# Altium PCB PCB1.PcbDoc
Units mm, origin at the board's own origin, x right, y up, seen from the top; angles counter-clockwise.
Board outline 83 x 36 mm, 2 copper layers (Top Layer, Bottom Layer); 22 components, 13 nets, 75 pads, 57 vias.
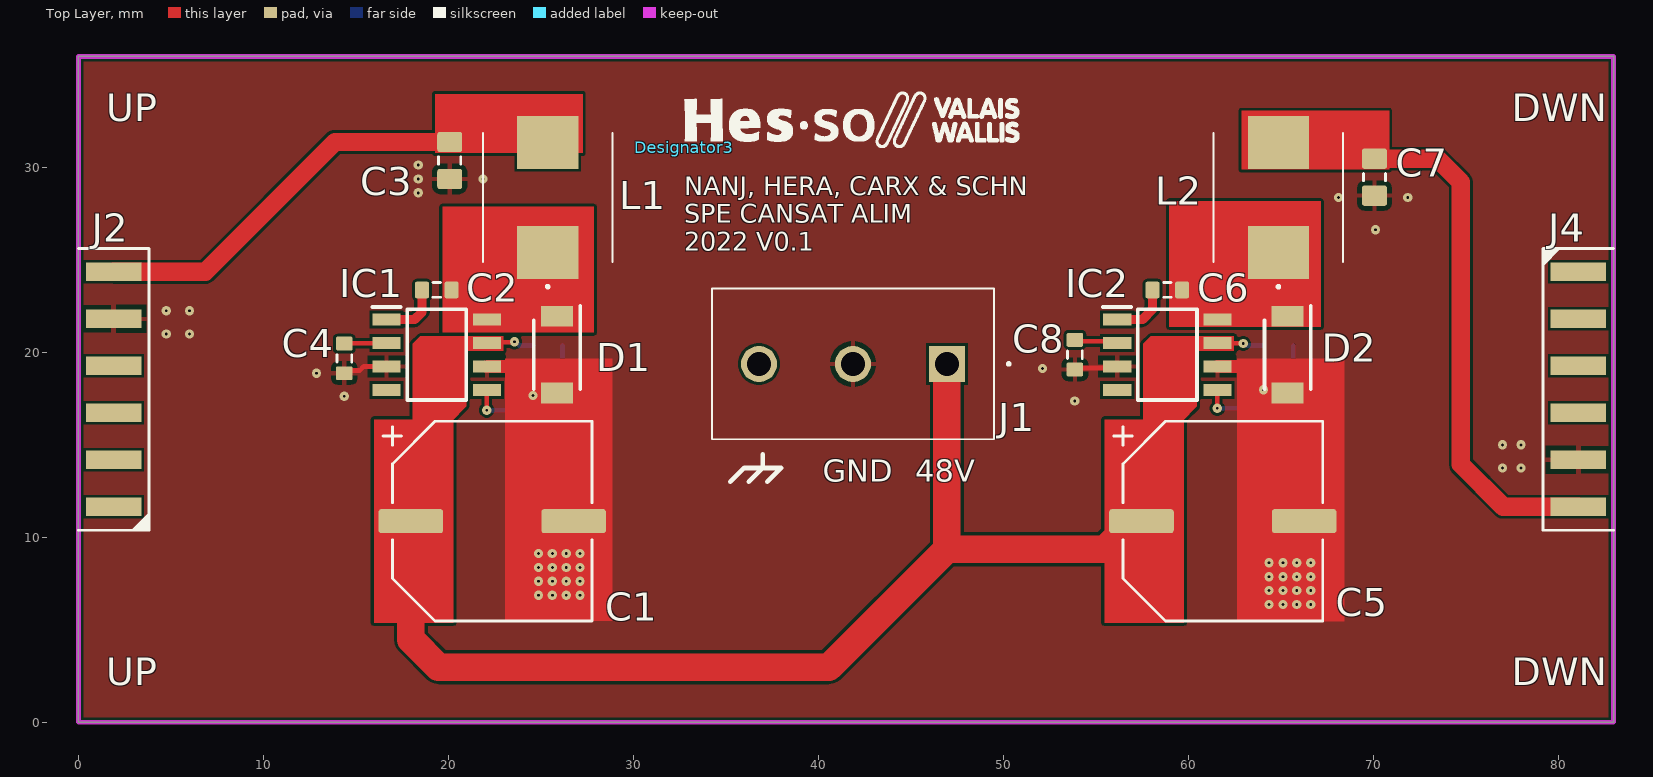
[diagram p0: Top Layer view]
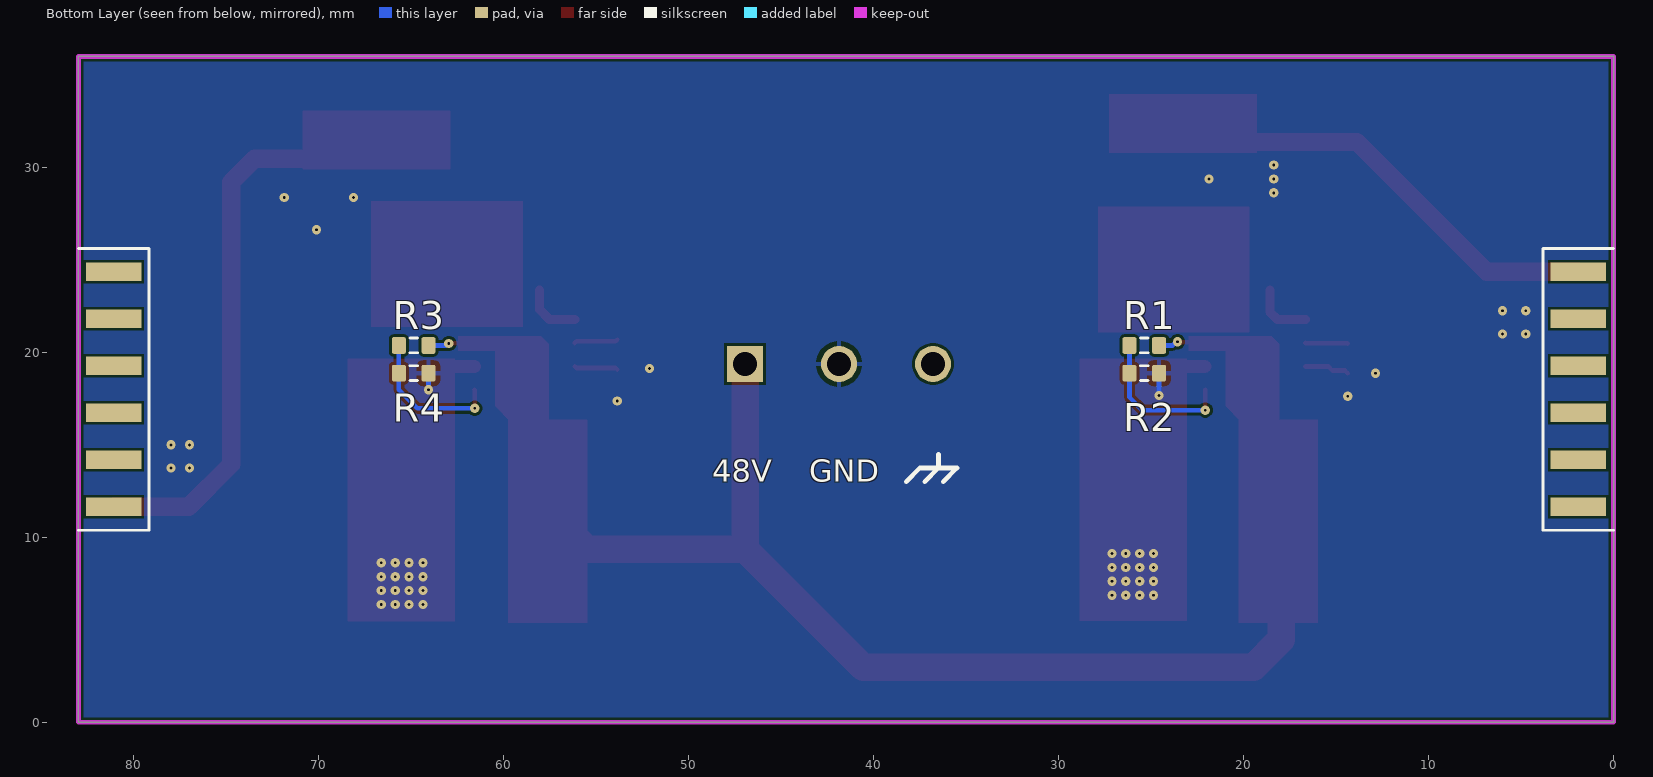
[diagram p1: Bottom Layer view, seen from below]
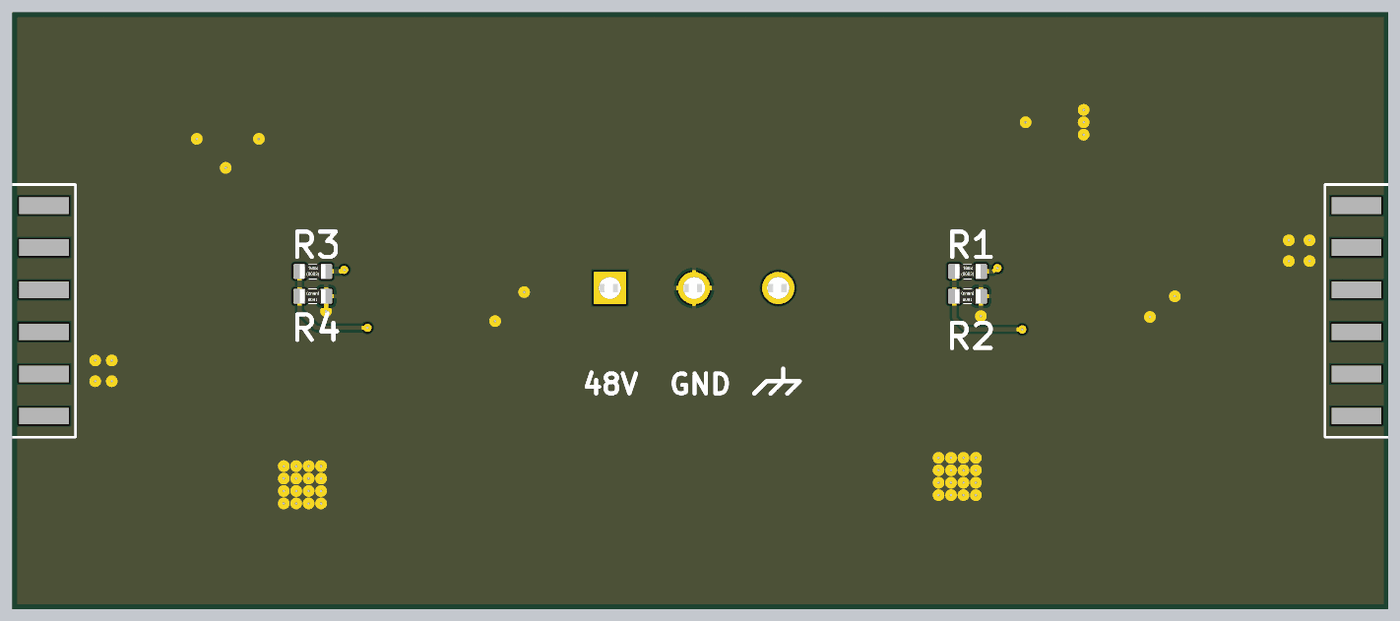
[diagram p2: 3D render of the assembled board from below, using the file's embedded part models]

## Layer stack, top to bottom
Top Solder: solder mask 0.0102, Solder Resist, Dk 3.5
Top Layer: signal copper 0.0356
Dielectric 1: dielectric 0.32, FR-4, Dk 4.8
Bottom Layer: signal copper 0.0356
Bottom Solder: solder mask 0.0102, Solder Resist, Dk 3.5

## Board outline
0.002,0.002 0.002,36.002 83.002,36.002 83.002,0.002

## Design rules (kind name [scope] priority, off if disabled: settings)
AssemblyTestPointUsage [All] p1 off:
AssemblyTestpoint [All] p1 off: testpointundercomponent=TRUE minsize=1.016 maxsize=2.54 preferedsize=1.524 minholesize=0 maxholesize=1.016 preferedholesize=0.813 testpointgrid=0.025 usegrid=TRUE gridtolerance=0 allowsidetop=TRUE allowsidebottom=TRUE
Clearance [All] p1: gap=0.15 ignorepadtopadclearanceinfootprint=TRUE
ComponentClearance [All] p1 off: gap=0.254 collisioncheckmode=3 verticalgap=0.254 showdistances=FALSE
DiffPairsRouting [All] p1 off: maxlimit=0.254 minlimit=0.254 mostfreqgap=0.254 toplayer_minwidth=0.381 toplayer_maxwidth=0.381 toplayer_prefwidth=0.381 bottomlayer_minwidth=0.381 bottomlayer_maxwidth=0.381 bottomlayer_prefwidth=0.381 maxuncoupledlength=12.7
FabricationTestPointUsage [All] p1 off: valid=0 allowmultiple=FALSE
FabricationTestpoint [All] p1 off: side=3 testpointundercomponent=TRUE minsize=1.016 maxsize=2.54 preferedsize=1.524 minholesize=0 maxholesize=1.016 preferedholesize=0.813 testpointgrid=0.025 allowsidetop=TRUE allowsidebottom=TRUE usegrid=TRUE gridtolerance=0
FanoutControl Fanout_BGA [IsBGA] p1 off: bgadir=Out bgaviamode=Centered fanoutstyle=Auto fanoutdirection=Alternating viagrid=0.025 // Fanout_BGA (Default Rule)
FanoutControl Fanout_LCC [IsLCC] p2 off: bgadir=Out bgaviamode=Centered fanoutstyle=Auto fanoutdirection=Alternating viagrid=0.025 // Fanout_LCC (Default Rule)
FanoutControl Fanout_SOIC [IsSOIC] p3 off: bgadir=Out bgaviamode=Centered fanoutstyle=Auto fanoutdirection=Alternating viagrid=0.025 // Fanout_SOIC (Default Rule)
FanoutControl Fanout_Small [(CompPinCount < 5)] p4 off: bgadir=Out bgaviamode=Centered fanoutstyle=Auto fanoutdirection=OutThenIn viagrid=0.025 // Fanout_Small (Default Rule)
FanoutControl Fanout_Default [All] p5 off: bgadir=Out bgaviamode=Centered fanoutstyle=Auto fanoutdirection=Alternating viagrid=0.025 // Fanout_Default (Default Rule)
Height [All] p1 off: minheight=0 maxheight=25.4 prefheight=12.7
HoleSize [All] p1 off: absolutevalues=TRUE maxlimit=2.54 minlimit=0.025 maxpercent=80.000 minpercent=20.000
HoleToHoleClearance [All] p1 off: gap=0.254 allowstackedmicrovias=TRUE
LayerPairs [All] p1 off: enforce=TRUE
MinimumSolderMaskSliver [All] p1 off: minsoldermaskwidth=0.254
NetAntennae [All] p1 off: netantennaetolerance=0
PasteMaskExpansion [All] p1 off: expansion=0
PlaneClearance [All] p1: clearance=0.25
PolygonConnect [All] p1: thpad.connectstyle=Relief thpad.reliefconductorwidth=0.254 thpad.reliefentries=4 thpad.polygonreliefangle="90 Angle" thpad.airgapwidth=0.254 smdpad.connectstyle=Relief smdpad.reliefconductorwidth=0.254 smdpad.reliefentries=4 smdpad.polygonreliefangle="90 Angle" smdpad.airgapwidth=0.254 via.connectstyle=Direct via.reliefconductorwidth=0.254 via.reliefentries=4 via.polygonreliefangle="90 Angle" via.airgapwidth=0.254
RoutingCorners [All] p1 off: cornerstyle=45-Degree minsetback=2.54 maxsetback=2.54
RoutingLayers [All] p1 off: top layer_v5=TRUE bottom layer_v5=TRUE
RoutingPriority [All] p1 off: routingpriority=0
RoutingTopology [All] p1 off: topology=Shortest
RoutingVias [All] p1: holewidth=0.15 width=0.5 viastyle="Through Hole" minholewidth=0.15 minwidth=0.5 maxholewidth=0.15 maxwidth=0.5 viatemplateguid#1={0F8D6943-ADF0-4AAE-A0C8-86B730172CDF} viatemplatename#1=v50h15m0mx0
SilkToSilkClearance [All] p1 off: silktosilkclearance=0.254
SilkToSolderMaskClearance [IsPad] p1 off: minsilkscreentomaskgap=0.254 clearancetoexposedcopper=TRUE
SolderMaskExpansion [All] p1 off: expansion=0.102 istentingtop=FALSE
Width [All] p1: maxlimit=2 minlimit=0.15 preferedwidth=0.25
5 further rules are at their usual default settings.

## Classes and differential pairs
component class PowerSupply: C1 C2 C3 C4 C5 C6 C7 C8 D1 D2 IC1 IC2 L1 L2 R1 R2 R3 R4

## Components (designator, comment, footprint, x,y, rotation, side; value= is the part's Value field where it differs from the comment)
C1 "68uF/63V" "Capacitor POL SMD D10.0 H10.0" 22.375,10.875 r0 top
C2 "100nF" "CAPACITOR 1608 REFLOW" 19.375,23.375 r0 top
C3 "68uF/6.3V" "CAPACITOR 2012 REFLOW" 20.075,30.375 r90 top
C4 "100nF" "CAPACITOR 1608 REFLOW" 14.375,19.675 r270 top
C5 "68uF/63V" "Capacitor POL SMD D10.0 H10.0" 61.875,10.875 r0 top
C6 "100nF" "CAPACITOR 1608 REFLOW" 58.875,23.375 r0 top
C7 "68uF/6.3V" "CAPACITOR 2012 REFLOW" 70.075,29.475 r90 top
C8 "100nF" "CAPACITOR 1608 REFLOW" 53.875,19.875 r270 top
D1 "RB088LAM100TFTR" SODFL4725X105N 25.875,19.875 r270 top
D2 "RB088LAM100TFTR" SODFL4725X105N 65.375,19.875 r270 top
Designator3 "Comment" "HES-SO_3 Top Overlay" 32.75,31.088 r0 top
IC1 "MAX5035BASA+" SOIC127P600X175-8N 19.375,19.875 r0 top
IC2 "MAX5035AASA+" SOIC127P600X175-8N 58.875,19.875 r0 top
J1 "1729131" 1729131 46.955,19.375 r180 top
J2 "*" "PINHEADER2X6 P2.54 SIDE MOUNT" 0,18 r180 top
J4 "*" "PINHEADER2X6 P2.54 SIDE MOUNT" 83,18 r0 top
L1 "SPM7054VT-101M-D" SPM7054VT 25.375,28.375 r90 top
L2 "SPM7054VT-101M-D" SPM7054VT 64.875,28.375 r90 top
R1 "1M" "RESISTOR 1608 REFLOW" 25.375,20.375 r180 bottom
R2 "384k" "RESISTOR 1608 REFLOW" 25.375,18.875 r0 bottom
R3 "1M" "RESISTOR 1608 REFLOW" 64.875,20.375 r180 bottom
R4 "384k" "RESISTOR 1608 REFLOW" 64.875,18.875 r0 bottom

## Footprints (in the part's own frame and the unit in brackets; to place one, negate y for a bottom-side part, rotate by r counter-clockwise, add the part's x,y. Pads: shape width x height; smd on the part's side, far side on the other; paste and mask are expansions set on the pad)
1729131 [mm]
  rect 1.95x1.95 hole 1.3: 1(0,0)
  round 1.95 hole 1.3: 2(5.08,0) 3(10.16,0)
  silkscreen extent -3.4,-4.08 12.7,4.08, body extent -2.95,-4.05 12.64,4.05, height 10.17
"CAPACITOR 1608 REFLOW" [mm] "Capacitor SMD 1.6x0.8mm (0603-imperial)"
  rrect25% 0.75x0.9 smd: 1(-0.8,0) 2(0.8,0)
  silkscreen extent -0.2,-0.4 0.2,0.4, body extent -0.8,-0.4 0.8,0.4, height 0.8
"CAPACITOR 2012 REFLOW" [mm] "Capacitor SMD 2.0x1.2mm (0805-imperial)"
  rrect25% 1.1x1.35 smd: 1(-1,0) 2(1,0)
  silkscreen extent -0.2,-0.6 0.2,0.6, body extent -1,-0.6 1,0.6, height 1
"Capacitor POL SMD D10.0 H10.0" [mm] "Capacitor Electrolyte Polarized SMD, Diameter 10mm, Height 10mm"
  rrect25% 3.5x1.3 smd: 1(-4.4,0) 2(4.4,0)
  silkscreen extent -5.9,-5.4 5.4,5.4, body extent -5.2,-5.2 5.2,5.2, height 10.01
"HES-SO_3 Top Overlay" [mm] "HESSO LOGO 3mm on TopOverlay"
  silkscreen extent 0.01,0 18.12,3
"PINHEADER2X6 P2.54 SIDE MOUNT" [mm] "Plug connector Mounted on PCB side"
  rect 3x1 smd: 1(-1.905,6.35) 3(-1.905,3.81) 5(-1.905,1.27) 7(-1.905,-1.27) 9(-1.905,-3.81) 11(-1.905,-6.35)
  rect 3x1 smd far side: 2(-1.905,6.35) 4(-1.905,3.81) 6(-1.905,1.27) 8(-1.905,-1.27) 10(-1.905,-3.81) 12(-1.905,-6.35)
  silkscreen extent -3.81,-7.62 0,7.62, body extent -2.86,-7.62 8.57,7.62, height 1.75
"RESISTOR 1608 REFLOW" [mm] "Resistor SMD 1.6x0.8mm (0603-imperial)"
  rrect25% 0.75x0.9 smd: 1(-0.8,0) 2(0.8,0)
  silkscreen extent -0.2,-0.4 0.2,0.4, body extent -0.77,-0.42 0.78,0.43, height 0.45
SODFL4725X105N [mm]
  rect 1.12x1.72 smd: 1(-2.075,0) 2(2.075,0)
  silkscreen extent -2.64,-1.25 1.85,1.25, body extent -2.35,-1.25 2.35,1.25, height 1.05
SOIC127P600X175-8N [mm]
  rect 1.525x0.65 smd: 1(-2.712,1.905) 2(-2.712,0.635) 3(-2.712,-0.635) 4(-2.712,-1.905) 5(2.712,-1.905) 6(2.712,-0.635) 7(2.712,0.635) 8(2.712,1.905)
  silkscreen extent -3.47,-2.45 1.6,2.58, body extent -3,-2.45 3,2.45, height 1.75
SPM7054VT [mm]
  rect 2.85x3.3 smd: 1(-2.975,0) 2(2.975,0)
  silkscreen extent -4.87,-3.5 3.5,3.5, body extent -3.68,-3.5 3.82,3.5, height 5.25

## Part data
C1 C5: library part "Capacitor Polarized", "Capacitor polarized"
C2 C3 C4 C6 C7 C8: library part Capacitor, "Capacitor"
D1 D2: "Schottky Diode", Manufacturer_Name="ROHM Semiconductor", Mouser Part Number=755-RB088LAM100TFTR, Datasheet Link=https://datasheet.datasheetarchive.com/originals/distributors/DKDS-39/8680.pdf, Height=1.05mm, Manufacturer_Part_Number=RB088LAM100TFTR, Mouser Price/Stock=https://www.mouser.co.uk/ProductDetail/ROHM-Semiconductor/RB088LAM100TFTR?qs=F5EMLAvA7IBXK%2Ft6O%252B6mTA%3D%3D
IC1: "Integrated Circuit", Manufacturer_Name="Maxim Integrated", Mouser Part Number=700-MAX5035BASA, Datasheet Link=http://datasheets.maximintegrated.com/en/ds/MAX5035.pdf, Height=1.75mm, Manufacturer_Part_Number=MAX5035BASA+, Mouser Price/Stock=https://www.mouser.co.uk/ProductDetail/Maxim-Integrated/MAX5035BASA%2b?qs=1THa7WoU59FgpJhZAGMb5g%3D%3D
IC2: library part MAX5035BASA+, "Integrated Circuit", Manufacturer_Name="Maxim Integrated", Mouser Part Number=700-MAX5035BASA, Datasheet Link=http://datasheets.maximintegrated.com/en/ds/MAX5035.pdf, Height=1.75mm, Manufacturer_Part_Number=MAX5035BASA+, Mouser Price/Stock=https://www.mouser.co.uk/ProductDetail/Maxim-Integrated/MAX5035BASA%2b?qs=1THa7WoU59FgpJhZAGMb5g%3D%3D
J1: "Connector", Manufacturer_Name="Phoenix Contact", Mouser Part Number=651-1729131, Arrow Part Number=1729131, Arrow Price/Stock=https://www.arrow.com/en/products/1729131/phoenix-contact, Datasheet Link=http://www.phoenixcontact.com/de/produkte/1729131/pdf, Height=10.15mm, Manufacturer_Part_Number=1729131, Mouser Price/Stock=https://www.mouser.co.uk/ProductDetail/Phoenix-Contact/1729131?qs=GFUSqQMLmmkspw%2F%2FW6PC3g%3D%3D
J2 J4: library part PinHeader2x6, "Plug connector"
L1 L2: "Inductor (FeSi Core)", Manufacturer_Name=TDK, Mouser Part Number=810-SPM7054VT-101M-D, Arrow Part Number=SPM7054VT-101M-D, Arrow Price/Stock=https://www.arrow.com/en/products/spm7054vt-101m-d/tdk, Datasheet Link=https://product.tdk.com/system/files/dam/doc/product/inductor/inductor/smd/catalog/inductor_automotive_power_spm7054vt-d_en.pdf, Manufacturer_Part_Number=SPM7054VT-101M-D, Mouser Price/Stock=https://www.mouser.co.uk/ProductDetail/TDK/SPM7054VT-101M-D/?qs=byeeYqUIh0MPh4h9VcxBVA%3D%3D
R1 R2 R3 R4: library part Resistor, "Resistor"

## Via types
v1: diameter 0.5, hole 0.15, Top Layer to Bottom Layer, 57 vias

## Nets (pads, with @x,y where several pads share a name; then routed paths per layer and width w, separated by ;. In a path a pad name is that pad's centre, name@x,y a point inside that pad or via, vN(x,y) a via of type N, cw(c..) or ccw(c..) an arc to the next point about the centre after c; other vN are vias at no path point)
+3V3: C7.2 J4.11 L2.2 | length 27.8
  Top Layer w1: C7.2 73.475,30.475 74.75,29.2 74.75,13.939 77.039,11.65 J4.11
+5: C3.2 J2.11 L1.2 | length 21.1
  Top Layer w1: J2.11 6.85,24.35 13.875,31.375 C3.2
+48V: C1.1 C5.1 IC1.7 IC2.7 J1.1 R1.2 R3.2 | length 65.2
  Top Layer w0.25: IC1.7 22.12,20.542 23.542,20.542 v1(23.575,20.575) ; IC2.7 61.605,20.492 62.958,20.492 v1(62.975,20.475)
  Top Layer w1.5: C1.1 17.975,4.475 19.475,2.975 40.575,2.975 46.955,9.355 ; J1.1 46.955,9.355 ; C5.1 57.375,10.775 56.475,10.775 56.475,10.334 55.496,9.355 46.955,9.355
  Bottom Layer w0.25: v1(23.575,20.575) 23.637,20.575 23.837,20.375 R1.2 ; v1(62.975,20.475) 63.043,20.475 63.143,20.375 R3.2
EARTH: J1.3
GND: C1.2 C3.1 C4.2 C5.2 C7.1 C8.2 D1.2 D2.2 IC1.3 IC1.6 IC2.3 IC2.6 J1.2 J2.9 J4.9 R2.1 R4.1 | length 11.1
  Top Layer w0.25: C4.2 14.52,19.02 15.2,19.02 15.42,19.24 IC1.3 ; 24.21,19.24 24.275,19.175 ; C8.2 53.957,19.157 56.08,19.157 IC2.3 ; 63.54,19.24 63.575,19.275
  Top Layer w0.7: IC1.6 24.21,19.24 ; IC2.6 63.54,19.24
  Bottom Layer w0.25: v1(24.575,17.675) R2.1 ; v1(64.075,17.975) R4.1
  other v1: 64.375,6.375 65.125,6.375 65.875,6.375 66.625,6.375 24.875,6.875 25.625,6.875 26.375,6.875 27.125,6.875 64.375,7.125 65.125,7.125 65.875,7.125 66.625,7.125 24.875,7.625 25.625,7.625 26.375,7.625 27.125,7.625 64.375,7.875 65.125,7.875 65.875,7.875 66.625,7.875 24.875,8.375 25.625,8.375 26.375,8.375 27.125,8.375 64.375,8.625 65.125,8.625 65.875,8.625 66.625,8.625 24.875,9.125 25.625,9.125 26.375,9.125 27.125,9.125 77,13.75 78,13.75 77,15 78,15 53.875,17.375 14.375,17.625 12.875,18.875 52.125,19.125 4.75,21 6,21 4.75,22.25 6,22.25 70.125,26.625 68.125,28.375 71.875,28.375 18.375,28.625 18.375,29.375 21.875,29.375 18.375,30.125
NetC2_1: C2.1 IC1.1 | length 3.3
  Top Layer w0.5: IC1.1 16.668,21.775 18.175,21.775 18.575,22.175 C2.1
NetC2_2: C2.2 D1.1 IC1.8 L1.1
NetC4_1: C4.1 IC1.2 | length 2.3
  Top Layer w0.25: C4.1 14.392,20.493 16.646,20.493 IC1.2
NetC6_1: C6.1 IC2.1 | length 3.2
  Top Layer w0.5: IC2.1 57.53,21.78 58.075,22.325 C6.1
NetC6_2: C6.2 D2.1 IC2.8 L2.1
NetC8_1: C8.1 IC2.2 | length 2.4
  Top Layer w0.25: C8.1 53.958,20.592 56.08,20.592 IC2.2
NetIC1_5: IC1.5 R1.1 R2.2 | length 8.3
  Top Layer w0.25: v1(22.075,16.875) 22.075,17.958 IC1.5
  Bottom Layer w0.25: v1(22.075,16.875) 25.475,16.875 26.175,17.575 R2.2 R1.1
NetIC2_5: IC2.5 R3.1 R4.2 | length 7.9
  Top Layer w0.25: v1(61.575,16.975) 61.575,17.958 IC2.5
  Bottom Layer w0.25: v1(61.575,16.975) 64.675,16.975 65.675,17.975 R4.2 R3.1
pads on no net: IC1.4 IC2.4 J2.1 J2.2 J2.3 J2.4 J2.5 J2.6 J2.7 J2.8 J2.10 J2.12 J4.1 J4.2 J4.3 J4.4 J4.5 J4.6 J4.7 J4.8 J4.10 J4.12

## Polygon pours and split planes (outlines as drawn)
GND on Top Layer "GND_L01_P000" (solid, pour order 0): 0,36 82.975,36 83,35.975 83,0 0,0
GND on Bottom Layer "GND_L02_P001" (solid, pour order 1): -0.003,35.994 82.994,35.994 83,36 83,0 0,0

## Keep-outs
Keep-Out Layer:
  the board outline again, w0.254

## Other copper
Top Layer:
  rectangle net +5: 19.275,30.775 27.275,33.975
  rectangle net +3V3: 62.875,29.875 70.875,33.075
  rectangle net NetC6_2: 58.975,21.375 67.175,28.175
  rectangle net +48V: 55.475,5.375 59.775,16.375
  rectangle net GND: 62.651,5.457 68.451,19.657
  rectangle net +48V: 15.975,5.375 20.275,16.375
  rectangle net GND: 23.075,5.475 28.875,19.675
  rectangle net NetC2_2: 19.675,21.075 27.875,27.875
  region net +48V: 59.675,16.275 60.475,17.075 60.475,20.075 62.475,20.075 62.475,20.875 57.975,20.875 57.575,20.475 57.575,16.275
  region net +48V: 20.175,16.275 20.975,17.075 20.975,20.075 22.975,20.075 22.975,20.875 18.475,20.875 18.075,20.475 18.075,16.275

## Silkscreen, mask and mechanical layers (free items; w line width, h text height)
Top Overlay:
  lines w0.254: 35.25,13 36,13.75 ; 36.25,13 37,13.75 ; 37,14.5 37,13.75 ; 37.25,13 38,13.75 36,13.75 ; 36,13.75 37,13.75 ; 37,13.75 37,13.75
  text "UP" at 1.5,32.5 h1.5
  text "DWN" at 77.5,32.5 h1.5
  text "NANJ, HERA, CARX & SCHN / SPE CANSAT ALIM / 2022 V0.1" at 32.75,25.5 h1
  text "GND" at 40.254,13.004 h1.2
  text "48V" at 45.254,13.004 h1.2
  text "UP" at 1.5,2 h1.5
  text "DWN" at 77.5,2 h1.5
Bottom Overlay:
  lines w0.254: 36.25,13 35.5,13.75 37.5,13.75 ; 36.5,14.5 36.5,13.75 ; 37.25,13 36.5,13.75 ; 38.25,13 37.5,13.75 ; 36.5,13.75 36.5,13.75 ; 36.5,13.75 37.5,13.75
  text "GND" at 43.496,13.004 h1.2
  text "48V" at 48.746,13.004 h1.2
Mechanical 1:
  the board outline again, w0.254